# EAGLE board P24v04r16A(several_comments_on_layer51) (EAGLE 6.5.0), part 1 of 2
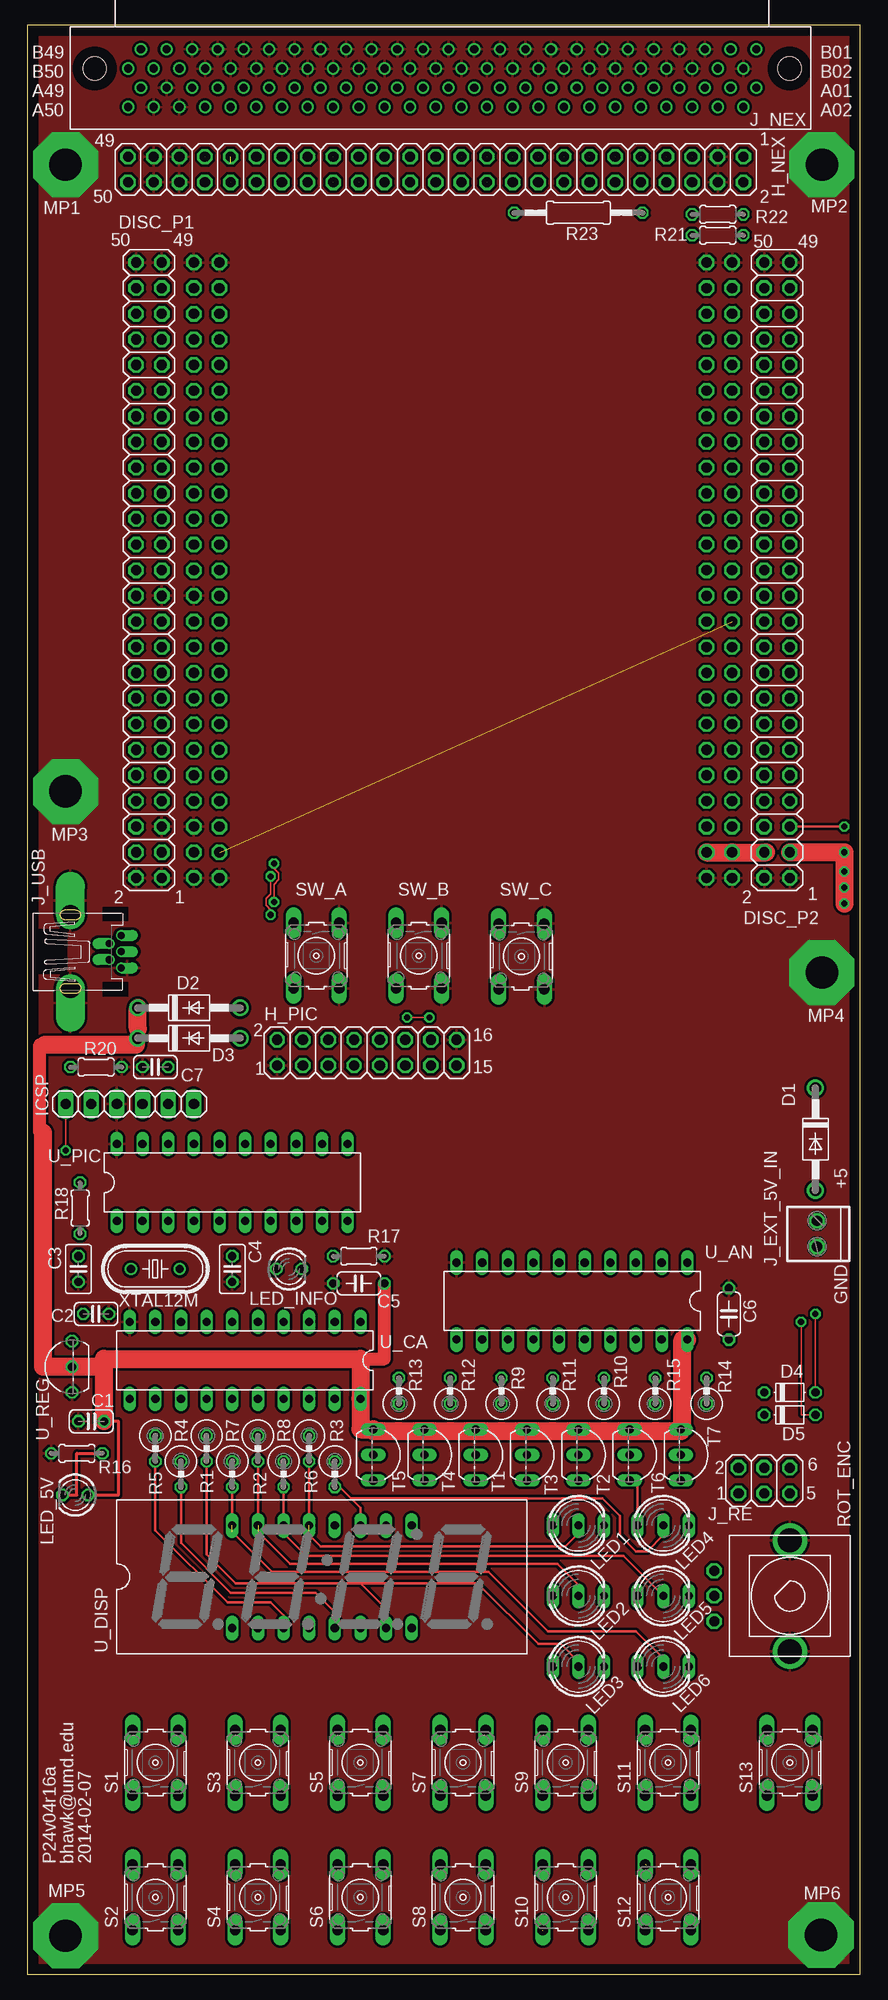
[diagram p0: board, top side]
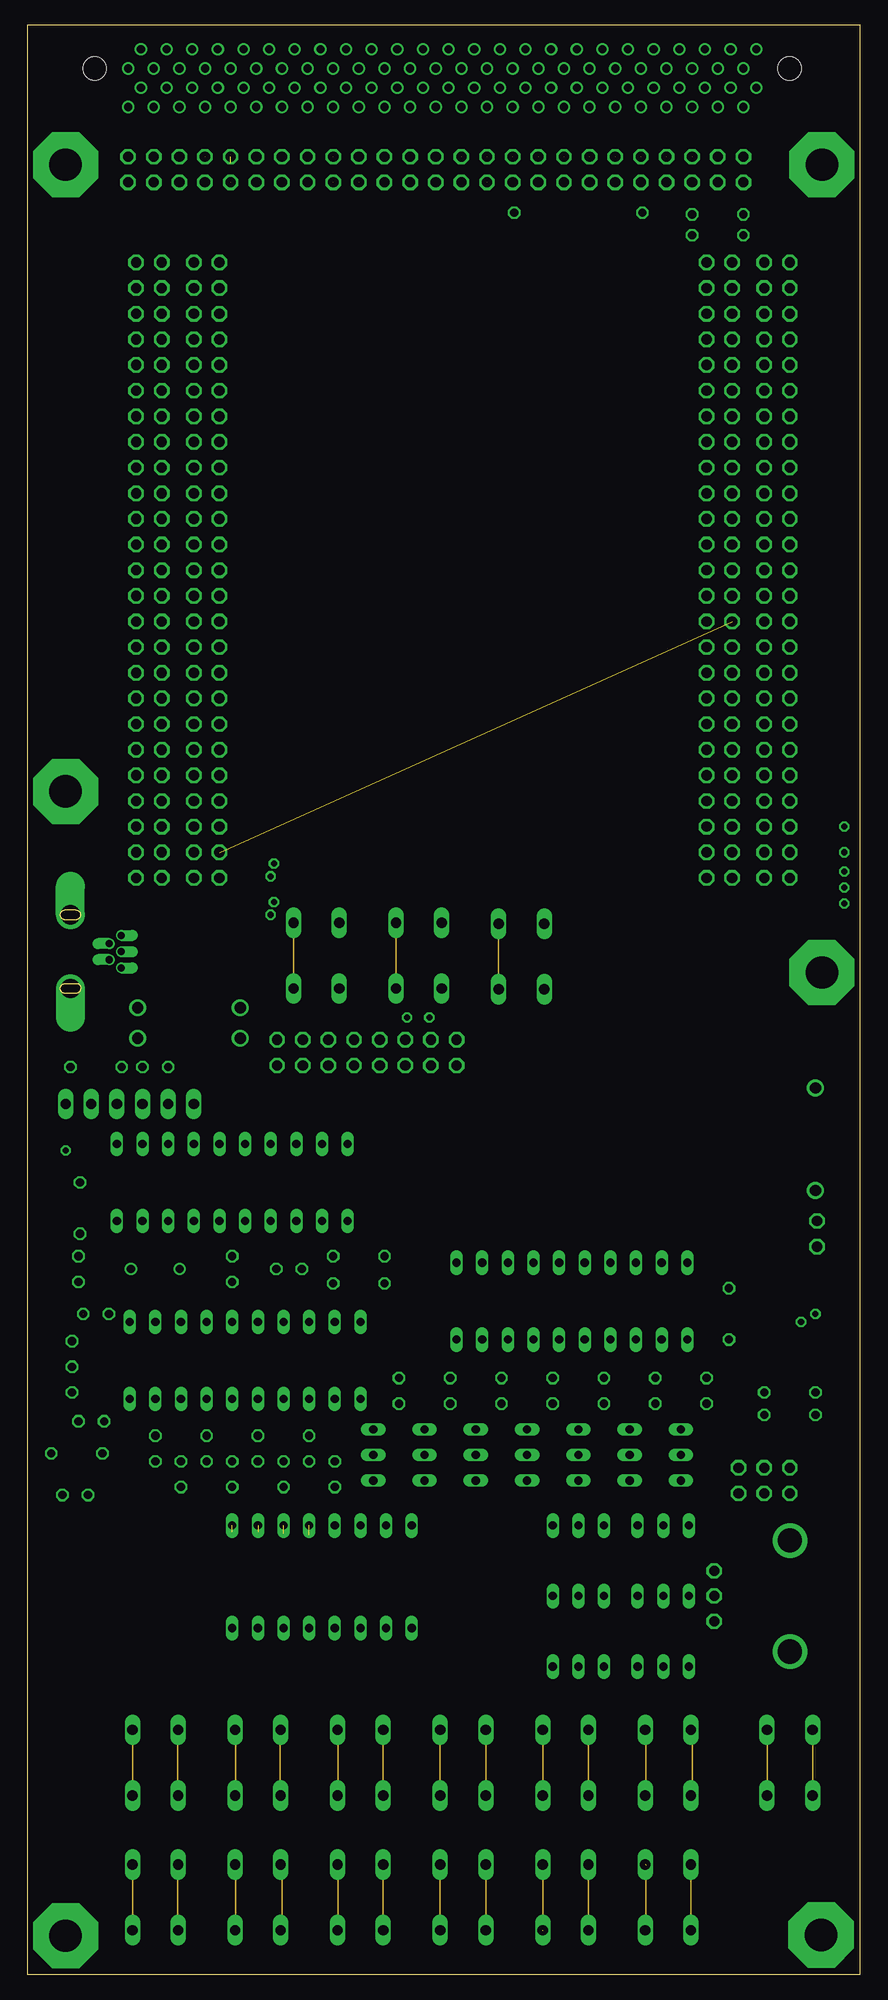
[diagram p1: board, inner layer Route15]
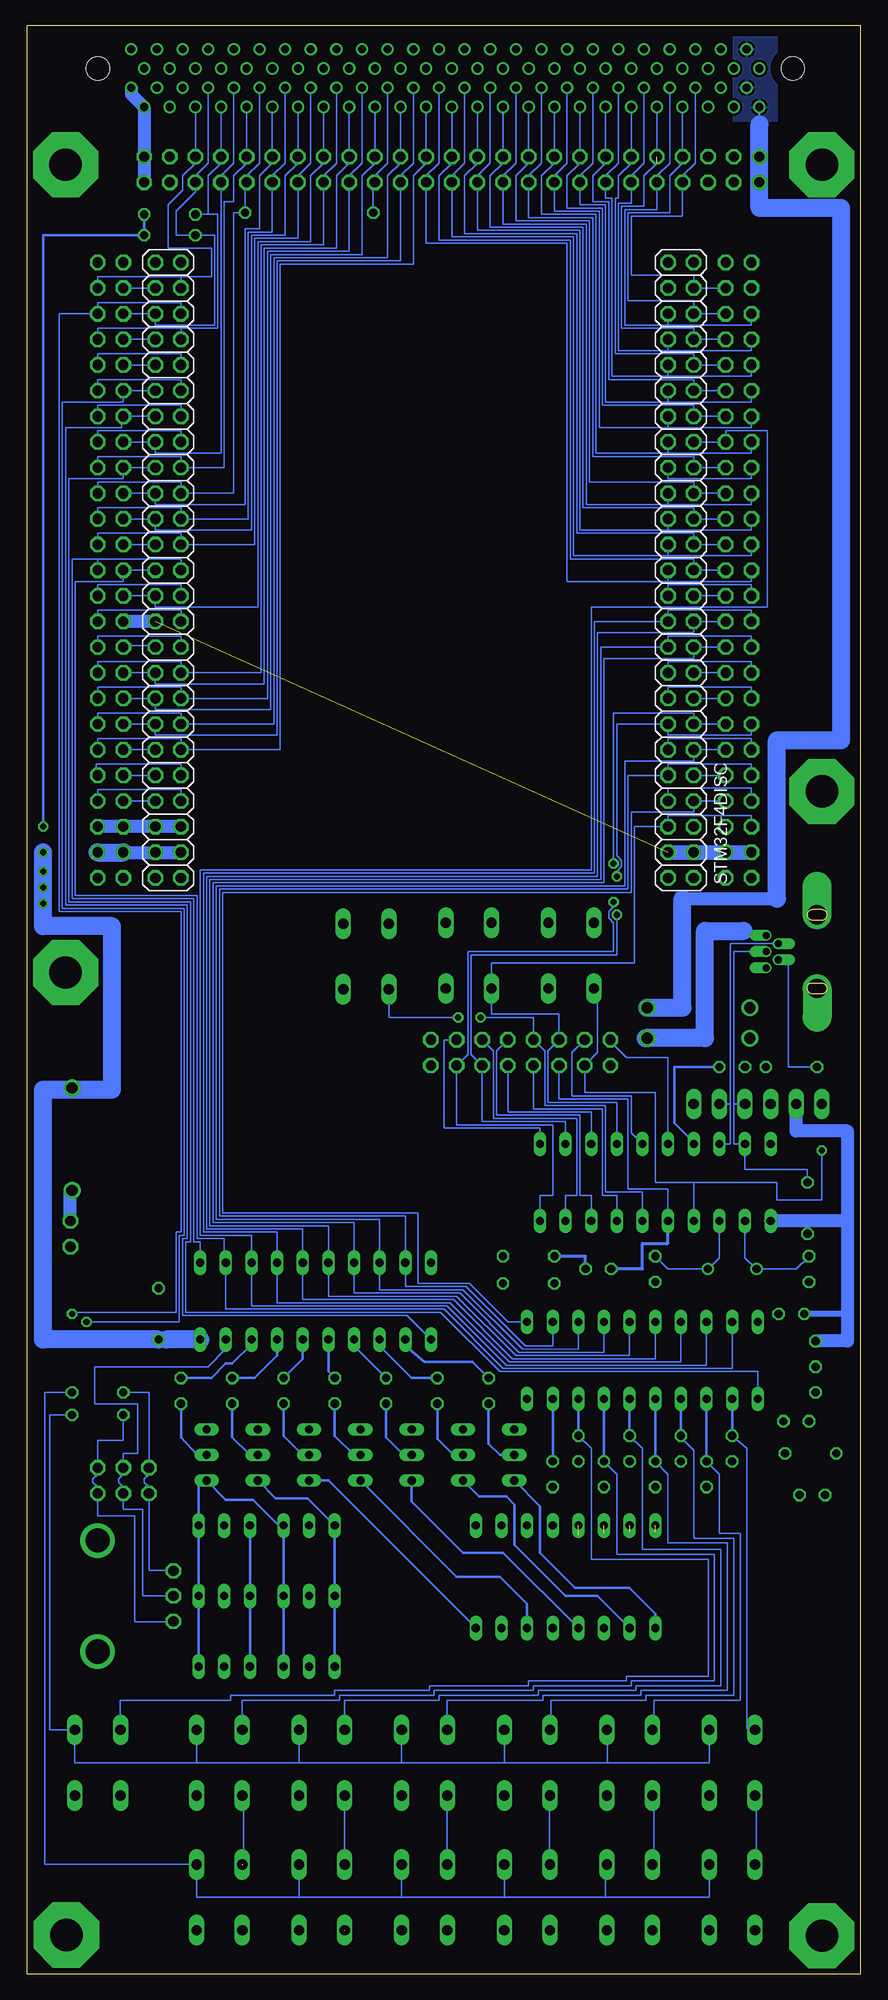
[diagram p2: board, bottom side, seen from below]

Size 82.55 x 193.04 mm. Coordinates in mm from the lower left corner, seen from the top.
Outline: 0,0 82.55,0 82.55,193.04 0,193.04 0,0
Copper layers (1*2+15*16): Top 0.035mm / dielectric 1.5mm / Route2 0.035mm / dielectric 0.15mm / Route15 0.035mm / dielectric 0.2mm / Bottom 0.035mm
Design rules "default": minimum track width 6mil, minimum drill 15mil, track to track 10mil, track to pad 10mil, pad to pad 10mil, via to via 10mil, smd to smd 10mil, copper to edge 40mil, drill to drill 8mil, minimum pad ring 8mil, minimum via ring 8mil, stop-mask expansion 4mil, vias tented up to drill 0mil, thermal gap 10mil

## Footprints (pad centres in the part's own frame; a part is rotated, then mirrored left to right if it is on the bottom)
C025-024X044 = drill 0.813 octagon: 1 -1.27,0; 2 1.27,0
C025-025X050 = drill 0.813 octagon: 1 -1.27,0; 2 1.27,0
C050-024X044 = drill 0.813 octagon: 1 -2.54,0; 2 2.54,0
DO41-10 = drill 1.118: A 5.08,0; C -5.08,0
D-5 = drill 0.813 octagon: A 2.54,0; C -2.54,0
2X25 = drill 1.016 octagon: 1 -30.48,-1.27; 2 -30.48,1.27; 3 -27.94,-1.27; 4 -27.94,1.27; 5 -25.4,-1.27; 6 -25.4,1.27; 7 -22.86,-1.27; 8 -22.86,1.27; 9 -20.32,-1.27; 10 -20.32,1.27; 11 -17.78,-1.27; 12 -17.78,1.27; 13 -15.24,-1.27; 14 -15.24,1.27; 15 -12.7,-1.27; 16 -12.7,1.27; 17 -10.16,-1.27; 18 -10.16,1.27; 19 -7.62,-1.27; 20 -7.62,1.27; 21 -5.08,-1.27; 22 -5.08,1.27; 23 -2.54,-1.27; 24 -2.54,1.27; 25 0,-1.27; 26 0,1.27; 27 2.54,-1.27; 28 2.54,1.27; 29 5.08,-1.27; 30 5.08,1.27; 31 7.62,-1.27; 32 7.62,1.27; 33 10.16,-1.27; 34 10.16,1.27; 35 12.7,-1.27; 36 12.7,1.27; 37 15.24,-1.27; 38 15.24,1.27; 39 17.78,-1.27; 40 17.78,1.27; 41 20.32,-1.27; 42 20.32,1.27; 43 22.86,-1.27; 44 22.86,1.27; 45 25.4,-1.27; 46 25.4,1.27; 47 27.94,-1.27; 48 27.94,1.27; 49 30.48,-1.27; 50 30.48,1.27
2X08 = drill 1.016 octagon: 1 -8.89,-1.27; 2 -8.89,1.27; 3 -6.35,-1.27; 4 -6.35,1.27; 5 -3.81,-1.27; 6 -3.81,1.27; 7 -1.27,-1.27; 8 -1.27,1.27; 9 1.27,-1.27; 10 1.27,1.27; 11 3.81,-1.27; 12 3.81,1.27; 13 6.35,-1.27; 14 6.35,1.27; 15 8.89,-1.27; 16 8.89,1.27
1X06 = drill 1.016 long: 1 -6.35,0; 2 -3.81,0; 3 -1.27,0; 4 1.27,0; 5 3.81,0; 6 6.35,0
PHOENIX_2POS_254 = drill 1.016 octagon: 1 -1.27,0; 2 1.27,0
FX2-100S_NEXYS2_SIGNALS = drill 0.8: A01_VCC3V3 0,0; A02_VCC3V3 -1.27,-1.905; A03_TMS -2.54,0; A04_JTSEL -3.81,-1.905; A05_TDO -5.08,0; A06_IO1 -6.35,-1.905; A07_IO2 -7.62,0; A08_IO3 -8.89,-1.905; A09_IO4 -10.16,0; A10_IO5 -11.43,-1.905; A11_IO6 -12.7,0; A12_IO7 -13.97,-1.905; A13_IO8 -15.24,0; A14_IO9 -16.51,-1.905; A15_IO10 -17.78,0; A16_IO11 -19.05,-1.905; A17_IO12 -20.32,0; A18_IN-13 -21.59,-1.905; A19_IO14 -22.86,0; A20_IO15 -24.13,-1.905; A21_IO16 -25.4,0; A22_IO17 -26.67,-1.905; A23_IO18 -27.94,0; A24_IO19 -29.21,-1.905; A25_IO20 -30.48,0; A26_IO21 -31.75,-1.905; A27_IO22 -33.02,0; A28_IO23 -34.29,-1.905; A29_IO24 -35.56,0; A30_IO25 -36.83,-1.905; A31_IO26 -38.1,0; A32_IO27 -39.37,-1.905; A33_IN-28 -40.64,0; A34_IN-29 -41.91,-1.905; A35_IO30 -43.18,0; A36_IO31 -44.45,-1.905; A37_IO32 -45.72,0; A38_IO33 -46.99,-1.905; A39_IO34 -48.26,0; A40_IO35 -49.53,-1.905; A41_IO36 -50.8,0; A42_IO37 -52.07,-1.905; A43_IO38 -53.34,0; A44_IO39 -54.61,-1.905; A45_IO40 -55.88,0; A46_GND -57.15,-1.905; A47_FX2-CLKOUT -58.42,0; A48_GND -59.69,-1.905; A49_VCC5V -60.96,0; A50_VCC5V -62.23,-1.905; B01_SHIELD 0,3.81; B02 -1.27,1.905; B03_TDO-ROM -2.54,3.81; B04_TCK -3.81,1.905; B05 -5.08,3.81; B06 -6.35,1.905; B07 -7.62,3.81; B08 -8.89,1.905; B09 -10.16,3.81; B10 -11.43,1.905; B11 -12.7,3.81; B12 -13.97,1.905; B13 -15.24,3.81; B14 -16.51,1.905; B15 -17.78,3.81; B16 -19.05,1.905; B17 -20.32,3.81; B18 -21.59,1.905; B19 -22.86,3.81; B20 -24.13,1.905; B21 -25.4,3.81; B22 -26.67,1.905; B23 -27.94,3.81; B24 -29.21,1.905; B25 -30.48,3.81; B26 -31.75,1.905; B27 -33.02,3.81; B28 -34.29,1.905; B29 -35.56,3.81; B30 -36.83,1.905; B31 -38.1,3.81; B32 -39.37,1.905; B33 -40.64,3.81; B34 -41.91,1.905; B35 -43.18,3.81; B36 -44.45,1.905; B37 -45.72,3.81; B38 -46.99,1.905; B39 -48.26,3.81; B40 -49.53,1.905; B41 -50.8,3.81; B42 -52.07,1.905; B43 -53.34,3.81; B44 -54.61,1.905; B45 -55.88,3.81; B46_FX2-CLKIN -57.15,1.905; B47 -58.42,3.81; B48_FX2-CLKIO -59.69,1.905; B49_VCC5V -60.96,3.81; B50_SHIELD -62.23,1.905 | hole 2.3: 3.31,1.905; -65.54,1.905
2X03 = drill 1.016 octagon: 1 -2.54,-1.27; 2 -2.54,1.27; 3 0,-1.27; 4 0,1.27; 5 2.54,-1.27; 6 2.54,1.27
USB_5P_MINI-DIP = drill 0.7 offset: 1 2.825,1.6; 2 1.625,0.8; 3 2.825,0; 4 1.625,-0.8; 5 2.825,-1.6 | drill 1.9 pad 2.3 offset: M1 -2.225,3.65; M2 -2.225,-3.65
DUOLED5MM = drill 0.813 long: AG -2.54,0; AR 2.54,0; K 0,0
LED3MM = drill 0.813 octagon: A -1.27,0; K 1.27,0
MOUNTING_HOLE125X250 = drill 3.2 pad 6.452 octagon: P$1 0,0
0309V = drill 0.813 octagon: 1 -1.27,0; 2 1.27,0
0204/5 = drill 0.813 octagon: 1 -2.54,0; 2 2.54,0
0207/12 = drill 0.813 octagon: 1 -6.35,0; 2 6.35,0
EVEG-H-K-L_V01 = drill 1 octagon: A -2.5,-7.5; B 2.5,-7.5; COM 0,-7.5 | drill 2.4: G1 -5.5,0; G2 5.5,0
B3F-10XX = drill 1.016 long: 1 -3.251,2.261; 2 3.251,2.261; 3 -3.251,-2.261; 4 3.251,-2.261
STM32F4DISCOVERY = drill 1.016 octagon: 01_GND 0,0; 02_GND 0,2.54; 03_VDD 2.54,0; 04_VDD 2.54,2.54; 05_GND 5.08,0; 06_NRST 5.08,2.54; 07_PC1 7.62,0; 08_PC0 7.62,2.54; 09_PC3 10.16,0; 10_PC2 10.16,2.54; 11_PA1 12.7,0; 12_PA0 12.7,2.54; 13_PA3 15.24,0; 14_PA2 15.24,2.54; 15_PA5 17.78,0; 16_PA4 17.78,2.54; 17_PA7 20.32,0; 18_PA6 20.32,2.54; 19_PC5 22.86,0; 20_PC4 22.86,2.54; 21_PB1 25.4,0; 22_PB0 25.4,2.54; 23_GND 27.94,0; 24_PB2 27.94,2.54; 25_PE7 30.48,0; 26_PE8 30.48,2.54; 27_PE9 33.02,0; 28_PE10 33.02,2.54; 29_PE11 35.56,0; 30_PE12 35.56,2.54; 31_PE13 38.1,0; 32_PE14 38.1,2.54; 33_PE15 40.64,0; 34_PB10 40.64,2.54; 35_PB11 43.18,0; 36_PB12 43.18,2.54; 37_PB13 45.72,0; 38_PB14 45.72,2.54; 39_PB15 48.26,0; 40_PD8 48.26,2.54; 41_PD9 50.8,0; 42_PD10 50.8,2.54; 43_PD11 53.34,0; 44_PD12 53.34,2.54; 45_PD13 55.88,0; 46_PD14 55.88,2.54; 47_PD15 58.42,0; 48_NC 58.42,2.54; 49_GND 60.96,0; 50_GND 60.96,2.54; 51_GND 0,50.8; 52_GND 0,53.34; 53_5V 2.54,50.8; 54_5V 2.54,53.34; 55_3V 5.08,50.8; 56_3V 5.08,53.34; 57_PH0 7.62,50.8; 58_PH1 7.62,53.34; 59_PC14 10.16,50.8; 60_PC15 10.16,53.34; 61_PE6 12.7,50.8; 62_PC13 12.7,53.34; 63_PE4 15.24,50.8; 64_PE5 15.24,53.34; 65_PE2 17.78,50.8; 66_PE3 17.78,53.34; 67_PE0 20.32,50.8; 68_PE1 20.32,53.34; 69_PB8 22.86,50.8; 70_PB9 22.86,53.34; 71_BOOT0 25.4,50.8; 72_VDD 25.4,53.34; 73_PB6 27.94,50.8; 74_PB7 27.94,53.34; 75_PB4 30.48,50.8; 76_PB5 30.48,53.34; 77_PD7 33.02,50.8; 78_PB3 33.02,53.34; 79_PD5 35.56,50.8; 80_PD6 35.56,53.34; 81_PD3 38.1,50.8; 82_PD4 38.1,53.34; 83_PD1 40.64,50.8; 84_PD2 40.64,53.34; 85_PC12 43.18,50.8; 86_PD0 43.18,53.34; 87_PC10 45.72,50.8; 88_PC11 45.72,53.34; 89_PA14 48.26,50.8; 90_PA15 48.26,53.34; 91_PA10 50.8,50.8; 92_PA13 50.8,53.34; 93_PA8 53.34,50.8; 94_PA9 53.34,53.34; 95_PC8 55.88,50.8; 96_PC9 55.88,53.34; 97_PC6 58.42,50.8; 98_PC7 58.42,53.34; 99_GND 60.96,50.8; 100_GND 60.96,53.34
TO92-CBE = drill 0.813 long: B 0,0; C -2.54,0; E 2.54,0
DIL20 = drill 0.813 long: 1 -11.43,-3.81; 2 -8.89,-3.81; 3 -6.35,-3.81; 4 -3.81,-3.81; 5 -1.27,-3.81; 6 1.27,-3.81; 7 3.81,-3.81; 8 6.35,-3.81; 9 8.89,-3.81; 10 11.43,-3.81; 11 11.43,3.81; 12 8.89,3.81; 13 6.35,3.81; 14 3.81,3.81; 15 1.27,3.81; 16 -1.27,3.81; 17 -3.81,3.81; 18 -6.35,3.81; 19 -8.89,3.81; 20 -11.43,3.81
LTC-4627_00 = drill 0.813 long: 1 -8.89,-5.08; 2 -6.35,-5.08; 3 -3.81,-5.08; 4 -1.27,-5.08; 5 1.27,-5.08; 6 3.81,-5.08; 7 6.35,-5.08; 8 8.89,-5.08; 9 8.89,5.08; 10 6.35,5.08; 11 3.81,5.08; 12 1.27,5.08; 13 -1.27,5.08; 14 -3.81,5.08; 15 -6.35,5.08; 16 -8.89,5.08
DIL20' = drill 0.813 long: 1 -10.16,-3.81; 2 -7.62,-3.81; 3 -5.08,-3.81; 4 -2.54,-3.81; 5 0,-3.81; 6 2.54,-3.81; 7 5.08,-3.81; 8 7.62,-3.81; 9 10.16,-3.81; 10 12.7,-3.81; 11 12.7,3.81; 12 10.16,3.81; 13 7.62,3.81; 14 5.08,3.81; 15 2.54,3.81; 16 0,3.81; 17 -2.54,3.81; 18 -5.08,3.81; 19 -7.62,3.81; 20 -10.16,3.81
TO92- = drill 0.813 octagon: 1 -2.54,0; 2 0,0; 3 2.54,0
HC49U-V = drill 0.813: 1 -2.413,0; 2 2.413,0

## Placement (x,y rotation side)
C1  ,P24CTL,DIG,445-5309-ND,CAP CER 1UF 10V 10% RADIAL,0.32,1,0.0222,10,0.1333,100,  [C025-024X044]  6.35,54.77 0 top
C2  ,P24CTL,DIG,445-5309-ND,CAP CER 1UF 10V 10% RADIAL,0.32,1,0.0222,10,0.1333,100,  [C025-024X044]  6.83,65.41 180 top
C3  ,P24CT,DIG,BC1034CT-ND,CAP CER 22PF 50V 5% RADIAL,0.25200,10,0.11760,100,  [C025-025X050]  5.08,69.85 270 top
C4  ,P24CT,DIG,BC1034CT-ND,CAP CER 22PF 50V 5% RADIAL,0.25200,10,0.11760,100,  [C025-025X050]  20.32,69.85 270 top
C5  ,P24IO,DIG,445-2849-ND,CAP CER 0.22UF 16V 10% RADIAL,0.29,1,0.20,10,0.12,100,  [C050-024X044]  32.86,68.42 180 top
C6  ,P24IO,DIG,445-2849-ND,CAP CER 0.22UF 16V 10% RADIAL,0.29,1,0.20,10,0.12,100,  [C050-024X044]  69.53,65.41 90 top
C7  ,P24CTL,DIG,445-5309-ND,CAP CER 1UF 10V 10% RADIAL,0.32,1,0.0222,10,0.1333,100,  [C025-024X044]  12.7,89.85 180 top
D1  ,P24IO,DIG,1N5817DICT-ND,DIODE SCHOTTKY 20V 1A DO-41,0.2039,100,  [DO41-10]  78.11,82.71 270 top
D2  ,P24IO,DIG,1N5817DICT-ND,DIODE SCHOTTKY 20V 1A DO-41,0.2039,100,  [DO41-10]  16.03,95.73 0 top
D3  ,P24IO,DIG,1N5817DICT-ND,DIODE SCHOTTKY 20V 1A DO-41,0.2039,100,  [DO41-10]  16.03,92.71 0 top
D4  [D-5]  75.56,57.63 0 top
D5  [D-5]  75.56,55.4 0 top
DISC_P1  [2X25]  12.06,139.06 90 top
DISC_P2  [2X25]  74.3,139.07 90 top
H_NEX  [2X25]  40.48,178.75 180 top
H_PIC  [2X08]  33.66,91.28 0 top
ICSP  [1X06]  10.16,86.2 0 top
J_EXT_5V_IN  [PHOENIX_2POS_254]  78.26,73.34 270 top
J_NEX  [FX2-100S_NEXYS2_SIGNALS]  72.23,186.85 0 top
J_RE  [2X03]  73.03,48.9 0 top
J_USB  ,P24CTL,DIG,WM17115-ND,CONN USB RECEPTACLE 5POS RT ANG,1.35200,10,1.26920,25,1.21420,50,  [USB_5P_MINI-DIP]  6.51,101.28 0 top
LED1  ,P24IO,DIG,754-1232-ND,LED IND 5MM RED/GRN WHT DIFF,0.2016,,  [DUOLED5MM]  54.61,44.45 0 top
LED2  ,P24IO,DIG,754-1232-ND,LED IND 5MM RED/GRN WHT DIFF,0.2016,,  [DUOLED5MM]  54.61,37.47 0 top
LED3  ,P24IO,DIG,754-1232-ND,LED IND 5MM RED/GRN WHT DIFF,0.2016,,  [DUOLED5MM]  54.61,30.48 0 top
LED4  ,P24IO,DIG,754-1232-ND,LED IND 5MM RED/GRN WHT DIFF,0.2016,,  [DUOLED5MM]  63.02,44.45 0 top
LED5  ,P24IO,DIG,754-1232-ND,LED IND 5MM RED/GRN WHT DIFF,0.2016,,  [DUOLED5MM]  63.02,37.47 0 top
LED6  ,P24IO,DIG,754-1232-ND,LED IND 5MM RED/GRN WHT DIFF,0.2016,,  [DUOLED5MM]  63.02,30.48 0 top
LED_5V  ,P24IO,DIG,754-1211-ND,LED SS 3MM 625NM RED DIFF,0.09,,  [LED3MM]  4.76,47.47 180 top
LED_INFO  ,P24CTL,DIG,754-1211-ND,LED SS 3MM 625NM RED DIFF,0.09,,  [LED3MM]  25.95,69.86 0 top
MP1  MOUNTING_HOLE  [MOUNTING_HOLE125X250]  3.81,179.23 0 top
MP2  MOUNTING_HOLE  [MOUNTING_HOLE125X250]  78.74,179.23 0 top
MP3  MOUNTING_HOLE  [MOUNTING_HOLE125X250]  3.81,117.16 0 top
MP4  MOUNTING_HOLE  [MOUNTING_HOLE125X250]  78.74,99.22 0 top
MP5  MOUNTING_HOLE  [MOUNTING_HOLE125X250]  3.81,3.81 0 top
MP6  MOUNTING_HOLE  [MOUNTING_HOLE125X250]  78.66,3.89 0 top
R1  ,P24IO,DIG,CF18JT330RCT-ND,RES 330 OHM 1/8W 5% CF AXIAL,0.09,,  [0309V]  17.78,52.07 270 top
R2  ,P24IO,DIG,CF18JT330RCT-ND,RES 330 OHM 1/8W 5% CF AXIAL,0.09,,  [0309V]  22.86,52.07 270 top
R3  ,P24IO,DIG,CF18JT330RCT-ND,RES 330 OHM 1/8W 5% CF AXIAL,0.09,,  [0309V]  30.48,49.53 270 top
R4  ,P24IO,DIG,CF18JT330RCT-ND,RES 330 OHM 1/8W 5% CF AXIAL,0.09,,  [0309V]  15.24,49.53 270 top
R5  ,P24IO,DIG,CF18JT330RCT-ND,RES 330 OHM 1/8W 5% CF AXIAL,0.09,,  [0309V]  12.7,52.07 270 top
R6  ,P24IO,DIG,CF18JT330RCT-ND,RES 330 OHM 1/8W 5% CF AXIAL,0.09,,  [0309V]  27.94,52.07 270 top
R7  ,P24IO,DIG,CF18JT330RCT-ND,RES 330 OHM 1/8W 5% CF AXIAL,0.09,,  [0309V]  20.32,49.53 270 top
R8  ,P24IO,DIG,CF18JT330RCT-ND,RES 330 OHM 1/8W 5% CF AXIAL,0.09,,  [0309V]  25.4,49.53 270 top
R9  ,P24IO,DIG,CF18JT4K70CT-ND,RES 4.7K OHM 1/8W 5% CF AXIAL,0.09,1,  [0309V]  46.99,57.78 90 top
R10  ,P24IO,DIG,CF18JT4K70CT-ND,RES 4.7K OHM 1/8W 5% CF AXIAL,0.09,1,  [0309V]  57.15,57.78 90 top
R11  ,P24IO,DIG,CF18JT4K70CT-ND,RES 4.7K OHM 1/8W 5% CF AXIAL,0.09,1,  [0309V]  52.07,57.78 90 top
R12  ,P24IO,DIG,CF18JT4K70CT-ND,RES 4.7K OHM 1/8W 5% CF AXIAL,0.09,1,  [0309V]  41.91,57.78 90 top
R13  ,P24IO,DIG,CF18JT4K70CT-ND,RES 4.7K OHM 1/8W 5% CF AXIAL,0.09,1,  [0309V]  36.83,57.78 90 top
R14  ,P24IO,DIG,CF18JT4K70CT-ND,RES 4.7K OHM 1/8W 5% CF AXIAL,0.09,1,  [0309V]  67.31,57.78 90 top
R15  ,P24IO,DIG,CF18JT4K70CT-ND,RES 4.7K OHM 1/8W 5% CF AXIAL,0.09,1,  [0309V]  62.23,57.78 90 top
R16  ,P24IO,DIG,CF18JT330RCT-ND,RES 330 OHM 1/8W 5% CF AXIAL,0.09,,  [0204/5]  4.92,51.59 0 top
R17  ,P24CTL,DIG,CF18JT330RCT-ND,RES 330 OHM 1/8W 5% CF AXIAL,0.09,,  [0204/5]  32.86,71.12 180 top
R18  ,P24CTL,DIG,CF18JT1K50CT-ND,RES 1.5K OHM 1/8W 5% CF AXIAL,0.09,1,  [0204/5]  5.24,75.88 90 top
R20  ,P24CTL,DIG,CF18JT100KCT-ND,RES 100K OHM 1/8W 5% CF AXIAL,0.09,1,  [0204/5]  6.83,89.85 180 top
R21  ,P24NXYS,DIG,CF18JT4K70CT-ND,RES 4.7K OHM 1/8W 5% CF AXIAL,0.09,1,  [0204/5]  68.42,172.24 180 top
R22  ,P24NXYS,DIG,CF18JT4K70CT-ND,RES 4.7K OHM 1/8W 5% CF AXIAL,0.09,1,  [0204/5]  68.42,174.31 180 top
R23  [0207/12]  54.61,174.47 180 top
ROT_ENC  ,P24IO,DIG,P10859-ND,ENCODER 12MM ROTARY VERT 17.5MM,0.54,  [EVEG-H-K-L_V01]  75.56,37.47 270 top
S1  ,P24IO,DIG,450-1649-ND,SWITCH TACTILE SPST-NO 0.05A 12V,0.09852,  [B3F-10XX]  12.7,20.95 90 top
S2  ,P24IO,DIG,450-1649-ND,SWITCH TACTILE SPST-NO 0.05A 12V,0.09852,  [B3F-10XX]  12.7,7.62 90 top
S3  ,P24IO,DIG,450-1649-ND,SWITCH TACTILE SPST-NO 0.05A 12V,0.09852,  [B3F-10XX]  22.86,20.95 90 top
S4  ,P24IO,DIG,450-1649-ND,SWITCH TACTILE SPST-NO 0.05A 12V,0.09852,  [B3F-10XX]  22.86,7.62 90 top
S5  ,P24IO,DIG,450-1649-ND,SWITCH TACTILE SPST-NO 0.05A 12V,0.09852,  [B3F-10XX]  33.02,20.95 90 top
S6  ,P24IO,DIG,450-1649-ND,SWITCH TACTILE SPST-NO 0.05A 12V,0.09852,  [B3F-10XX]  33.02,7.62 90 top
S7  ,P24IO,DIG,450-1649-ND,SWITCH TACTILE SPST-NO 0.05A 12V,0.09852,  [B3F-10XX]  43.18,20.95 90 top
S8  ,P24IO,DIG,450-1649-ND,SWITCH TACTILE SPST-NO 0.05A 12V,0.09852,  [B3F-10XX]  43.18,7.62 90 top
S9  ,P24IO,DIG,450-1649-ND,SWITCH TACTILE SPST-NO 0.05A 12V,0.09852,  [B3F-10XX]  53.34,20.95 90 top
S10  ,P24IO,DIG,450-1649-ND,SWITCH TACTILE SPST-NO 0.05A 12V,0.09852,  [B3F-10XX]  53.34,7.62 90 top
S11  ,P24IO,DIG,450-1649-ND,SWITCH TACTILE SPST-NO 0.05A 12V,0.09852,  [B3F-10XX]  63.5,20.95 90 top
S12  ,P24IO,DIG,450-1649-ND,SWITCH TACTILE SPST-NO 0.05A 12V,0.09852,  [B3F-10XX]  63.5,7.62 90 top
S13  ,P24IO,DIG,450-1649-ND,SWITCH TACTILE SPST-NO 0.05A 12V,0.09852,  [B3F-10XX]  75.56,20.95 90 top
STM32F4DISC  [STM32F4DISCOVERY]  16.51,108.58 90 bottom
SW_A  ,P24CTL,DIG,450-1649-ND,SWITCH TACTILE SPST-NO 0.05A 12V,0.09852,  [B3F-10XX]  28.65,100.89 270 top
SW_B  ,P24CTL,DIG,450-1649-ND,SWITCH TACTILE SPST-NO 0.05A 12V,0.09852,  [B3F-10XX]  38.81,100.89 270 top
SW_C  ,P24CTL,DIG,450-1649-ND,SWITCH TACTILE SPST-NO 0.05A 12V,0.09852,  [B3F-10XX]  48.97,100.81 270 top
T1  ,P24IO,DIG,2N3906-APCT-ND,TRANSISTOR PNP GP 40V TO92,0.12,100,  [TO92-CBE]  44.45,51.44 270 top
T2  ,P24IO,DIG,2N3906-APCT-ND,TRANSISTOR PNP GP 40V TO92,0.12,100,  [TO92-CBE]  54.61,51.44 270 top
T3  ,P24IO,DIG,2N3906-APCT-ND,TRANSISTOR PNP GP 40V TO92,0.12,100,  [TO92-CBE]  49.53,51.44 270 top
T4  ,P24IO,DIG,2N3906-APCT-ND,TRANSISTOR PNP GP 40V TO92,0.12,100,  [TO92-CBE]  39.37,51.44 270 top
T5  ,P24IO,DIG,2N3906-APCT-ND,TRANSISTOR PNP GP 40V TO92,0.12,100,  [TO92-CBE]  34.29,51.44 270 top
T6  ,P24IO,DIG,2N3906-APCT-ND,TRANSISTOR PNP GP 40V TO92,0.12,100,  [TO92-CBE]  59.69,51.44 270 top
T7  ,P24IO,DIG,2N3906-APCT-ND,TRANSISTOR PNP GP 40V TO92,0.12,100,  [TO92-CBE]  64.77,51.44 270 top
U_AN  ,P24IO,DIG,AE9998-ND,IC SOCKET STRAIGHT 20POS TIN,0.27300,10,0.23400,25,0.19900,50,0.19110,100,  [DIL20]  53.98,66.67 180 top
U_CA  ,P24IO,DIG,AE9998-ND,IC SOCKET STRAIGHT 20POS TIN,0.27300,10,0.23400,25,0.19900,50,0.19110,100,  [DIL20]  21.59,60.8 180 top
U_DISP  ,P24IO,DIG,160-1550-5-ND,LED 7-SEG .4" 4DGT SUPER RED CA,2.70500,10,  [LTC-4627_00]  29.21,39.37 0 top
U_PIC  ,P24CTL,DIG,AE9998-ND,IC SOCKET STRAIGHT 20POS TIN,0.27300,10,0.23400,25,0.19900,50,0.19110,100,  [DIL20']  19.05,78.42 0 top
U_REG  ,P24CTL,DIG,MCP1700-3302E/TO-ND,IC LDO REG 250MA 3.3V TO-92-3,0.53,1,8.25,25,  [TO92-]  4.45,60.17 90 top
XTAL12M  ,P24CTL,DIG,CTX904-ND,CRYSTAL 12.0 MHZ 18PF,0.261,10,  [HC49U-V]  12.7,69.85 180 top

## Library data of the parts
C1-C7 R1-R18 R20-R23 = rcl
D1-D5 = diode
DISC_P1 DISC_P2 H_NEX H_PIC ICSP J_RE = pinhead
J_EXT_5V_IN = phoenix_254
J_NEX = hirose-conn
J_USB = USB_5P_mini-DIP
LED1-LED6 LED_5V LED_INFO = led
MP1-MP6 = mounting_hole_mod
ROT_ENC = panasonic_12mm_rotary_encoder_01
S1-S13 SW_A SW_B SW_C = switch-omron
STM32F4DISC = temp1
T1-T7 = transistor
U_AN U_CA = 74ttl-din
U_DISP = LTC-4627
U_PIC = microchip_pic18f14k50
U_REG = maxim
XTAL12M = crystal

## Nets
5V_IN: D1.A J_EXT_5V_IN.1
5V_PWR: LED_5V.K R16.2
(D)SW_1-3-5-7-9-11-13-ROT_ENC-B: D5.C J_RE.5 J_RE.6 ROT_ENC.B
(D)SW_2-4-6-8-10-12-ROT_ENC-A: D4.C J_RE.1 J_RE.2 ROT_ENC.A
(R)AN_G: R15.2 U_AN.17
(R)AN_R: R14.2 U_AN.18
(R)CA_A/LED5/SW_11-12: R8.1 S11.1 S11.2 S12.1 S12.2 U_CA.17
(R)CA_B/LED6/SW_7-8: R7.1 S7.1 S7.2 S8.1 S8.2 U_CA.15
(R)CA_C/LED1/SW_13: R6.1 S13.1 S13.2 U_CA.18
(R)CA_D/SW_1-2: R5.1 S1.1 S1.2 S2.1 S2.2 U_CA.12
(R)CA_DP/LED3/SW_5-6: R1.1 S5.1 S5.2 S6.1 S6.2 U_CA.14
(R)CA_E/SW_3-4: R4.1 S3.1 S3.2 S4.1 S4.2 U_CA.13
(R)CA_F/LED4: R3.1 U_CA.19
(R)CA_G/LED2/SW_9-10: R2.1 S9.1 S9.2 S10.1 S10.2 U_CA.16
(R)COLON: R9.2 U_AN.14
(R)DIGIT1: R13.2 U_AN.12
(R)DIGIT2: R12.2 U_AN.13
(R)DIGIT3: R11.2 U_AN.15
(R)DIGIT4: R10.2 U_AN.16
(R)FSMC_CLK/NEXYS_GCLK10: H_NEX.20 J_NEX.A21_IO16 R23.2
(T)AN_G: R15.1 T6.B
(T)AN_R: R14.1 T7.B
(T)COLON: R9.1 T1.B
(T)DIGIT1: R13.1 T5.B
(T)DIGIT2: R12.1 T4.B
(T)DIGIT3: R11.1 T3.B
(T)DIGIT4: R10.1 T2.B
+3V3: C2.2 ICSP.2 R18.1 U_PIC.1 U_REG.3
AN_G: LED1.AG LED2.AG LED3.AG LED4.AG LED5.AG LED6.AG T6.E
AN_R: LED1.AR LED2.AR LED3.AR LED4.AR LED5.AR LED6.AR T7.E
CA_A/LED5: LED5.K R8.2 U_DISP.14
CA_B/LED6: LED6.K R7.2 U_DISP.16
CA_C/LED1: LED1.K R6.2 U_DISP.13
CA_D: R5.2 U_DISP.3
CA_DP/LED3: LED3.K R1.2 U_DISP.7
CA_E: R4.2 U_DISP.5
CA_F/LED4: LED4.K R3.2 U_DISP.11
CA_G/LED2: LED2.K R2.2 U_DISP.15
COLON: T1.E U_DISP.4
DAC_I2S3_MCLK: DISC_P2.48 STM32F4DISC.98_PC7
DAC_I2S3_SCK: DISC_P2.37 STM32F4DISC.87_PC10
DAC_I2S3_SD: DISC_P2.35 STM32F4DISC.85_PC12
DAC_I2S3_WS: DISC_P1.16 STM32F4DISC.16_PA4
DAC_SCL: DISC_P2.23 STM32F4DISC.73_PB6
DAC_SDA: DISC_P2.20 STM32F4DISC.70_PB9
DIGIT1: T5.E U_DISP.1
DIGIT2: T4.E U_DISP.2
DIGIT3: T3.E U_DISP.6
DIGIT4: T2.E U_DISP.8
DISC_3V: DISC_P2.5 DISC_P2.6 R21.1 R22.1 STM32F4DISC.55_3V STM32F4DISC.56_3V
DISC_BOOT0: DISC_P2.21 STM32F4DISC.71_BOOT0
DISC_BOOT1: DISC_P1.24 STM32F4DISC.24_PB2
DISC_I2C3_SCL: DISC_P2.43 H_NEX.7 J_NEX.A08_IO3 R22.2 STM32F4DISC.93_PA8
DISC_I2C3_SDA: DISC_P2.46 H_NEX.6 J_NEX.A07_IO2 R21.2 STM32F4DISC.96_PC9
DISC_NRST/SWD_NRST/PIC_RC2: DISC_P1.6 H_PIC.6 STM32F4DISC.06_NRST SW_B.3 SW_B.4 U_PIC.14
DISC_OSC_IN: DISC_P2.9 STM32F4DISC.59_PC14
DISC_OSC_OUT: DISC_P2.10 STM32F4DISC.60_PC15
DISC_PH0: DISC_P2.7 STM32F4DISC.57_PH0
DISC_PH1: DISC_P2.8 STM32F4DISC.58_PH1
DISC_RTC_AF1: DISC_P2.12 STM32F4DISC.62_PC13
DISC_VDD(JP1_3V): DISC_P1.3 DISC_P1.4 DISC_P2.22 STM32F4DISC.03_VDD STM32F4DISC.04_VDD STM32F4DISC.72_VDD
FSMC_A16: DISC_P1.43 H_NEX.41 J_NEX.A42_IO37 STM32F4DISC.43_PD11
FSMC_A17: DISC_P1.44 H_NEX.40 J_NEX.A41_IO36 STM32F4DISC.44_PD12
FSMC_A18: DISC_P1.45 H_NEX.43 J_NEX.A44_IO39 STM32F4DISC.45_PD13
FSMC_A19/MEMS_CS_I2C-SPI: DISC_P2.16 H_NEX.19 J_NEX.A20_IO15 STM32F4DISC.66_PE3
FSMC_A20: DISC_P2.13 H_NEX.21 J_NEX.A22_IO17 STM32F4DISC.63_PE4
FSMC_A21: DISC_P2.14 H_NEX.22 J_NEX.A23_IO18 STM32F4DISC.64_PE5
FSMC_A22: DISC_P2.11 H_NEX.23 J_NEX.A24_IO19 STM32F4DISC.61_PE6
FSMC_A23: DISC_P2.15 H_NEX.18 J_NEX.A19_IO14 STM32F4DISC.65_PE2
FSMC_CLK: DISC_P2.31 H_NEX.10 J_NEX.A11_IO6 R23.1 STM32F4DISC.81_PD3
FSMC_DA00: DISC_P1.46 H_NEX.42 J_NEX.A43_IO38 STM32F4DISC.46_PD14
FSMC_DA01: DISC_P1.47 H_NEX.44 J_NEX.A45_IO40 STM32F4DISC.47_PD15
FSMC_DA02: DISC_P2.36 H_NEX.8 J_NEX.A09_IO4 STM32F4DISC.86_PD0
FSMC_DA03: DISC_P2.33 H_NEX.9 J_NEX.A10_IO5 STM32F4DISC.83_PD1
FSMC_DA04: DISC_P1.25 H_NEX.25 J_NEX.A26_IO21 STM32F4DISC.25_PE7
FSMC_DA05: DISC_P1.26 H_NEX.24 J_NEX.A25_IO20 STM32F4DISC.26_PE8
FSMC_DA06: DISC_P1.27 H_NEX.27 J_NEX.A28_IO23 STM32F4DISC.27_PE9
FSMC_DA07: DISC_P1.28 H_NEX.26 J_NEX.A27_IO22 STM32F4DISC.28_PE10
FSMC_DA08: DISC_P1.29 H_NEX.29 J_NEX.A30_IO25 STM32F4DISC.29_PE11
FSMC_DA09: DISC_P1.30 H_NEX.28 J_NEX.A29_IO24 STM32F4DISC.30_PE12
FSMC_DA10: DISC_P1.31 H_NEX.31 J_NEX.A32_IO27 STM32F4DISC.31_PE13
FSMC_DA11: DISC_P1.32 H_NEX.30 J_NEX.A31_IO26 STM32F4DISC.32_PE14
FSMC_DA12: DISC_P1.33 H_NEX.32 J_NEX.A33_IN-28 STM32F4DISC.33_PE15
FSMC_DA13: DISC_P1.40 H_NEX.36 J_NEX.A37_IO32 STM32F4DISC.40_PD8
FSMC_DA14: DISC_P1.41 H_NEX.39 J_NEX.A40_IO35 STM32F4DISC.41_PD9
FSMC_DA15: DISC_P1.42 H_NEX.38 J_NEX.A39_IO34 STM32F4DISC.42_PD10
FSMC_NADV: DISC_P2.24 H_NEX.15 J_NEX.A16_IO11 STM32F4DISC.74_PB7
FSMC_NBL0/MEMS_INT1: DISC_P2.17 H_NEX.16 J_NEX.A17_IO12 STM32F4DISC.67_PE0
FSMC_NBL1/MEMS_INT2: DISC_P2.18 H_NEX.17 J_NEX.A18_IN-13 STM32F4DISC.68_PE1
FSMC_NE1: DISC_P2.27 H_NEX.14 J_NEX.A15_IO10 STM32F4DISC.77_PD7
FSMC_NOE/DAC_NRST: DISC_P2.32 H_NEX.11 J_NEX.A12_IO7 STM32F4DISC.82_PD4
FSMC_NWAIT: DISC_P2.30 H_NEX.13 J_NEX.A14_IO9 STM32F4DISC.80_PD6
FSMC_NWE/OTG_FS_OVERCURRENT: DISC_P2.29 H_NEX.12 J_NEX.A13_IO8 STM32F4DISC.79_PD5
GND: C1.1 C2.1 C3.2 C4.2 C5.2 C6.2 C7.2 DISC_P1.1 DISC_P1.2 DISC_P1.5 DISC_P1.23 DISC_P1.49 DISC_P1.50 DISC_P2.1 DISC_P2.2 DISC_P2.49 DISC_P2.50 H_NEX.3 H_NEX.4 H_NEX.45 H_NEX.46 H_NEX.47 H_NEX.48 H_PIC.1 H_PIC.16 ICSP.3 J_EXT_5V_IN.2 J_NEX.A46_GND J_NEX.A47_FX2-CLKOUT J_NEX.A48_GND J_NEX.B02 J_NEX.B05 J_NEX.B06 J_NEX.B07 J_NEX.B08 J_NEX.B09 J_NEX.B10 J_NEX.B11 J_NEX.B12 J_NEX.B13 J_NEX.B14 J_NEX.B15 J_NEX.B16 J_NEX.B17 J_NEX.B18 J_NEX.B19 J_NEX.B20 J_NEX.B21 J_NEX.B22 J_NEX.B23 J_NEX.B24 J_NEX.B25 J_NEX.B26 J_NEX.B27 J_NEX.B28 J_NEX.B29 J_NEX.B30 J_NEX.B31 J_NEX.B32 J_NEX.B33 J_NEX.B34 J_NEX.B35 J_NEX.B36 J_NEX.B37 J_NEX.B38 J_NEX.B39 J_NEX.B40 J_NEX.B41 J_NEX.B42 J_NEX.B43 J_NEX.B44 J_NEX.B45 J_USB.5 J_USB.M1 J_USB.M2 MP1.P$1 MP2.P$1 MP3.P$1 MP4.P$1 MP5.P$1 MP6.P$1 R16.1 R17.1 R20.1 ROT_ENC.G1 ROT_ENC.G2 STM32F4DISC.01_GND STM32F4DISC.02_GND STM32F4DISC.05_GND STM32F4DISC.23_GND STM32F4DISC.49_GND STM32F4DISC.50_GND STM32F4DISC.51_GND STM32F4DISC.52_GND STM32F4DISC.99_GND STM32F4DISC.100_GND SW_A.1 SW_A.2 SW_B.1 SW_B.2 SW_C.1 SW_C.2 U_AN.10 U_CA.10 U_PIC.20 U_REG.1
MEMS_MISO: DISC_P1.18 STM32F4DISC.18_PA6
MEMS_MOSI: DISC_P1.17 STM32F4DISC.17_PA7
MEMS_SCLK: DISC_P1.15 STM32F4DISC.15_PA5
MIC_CLK: DISC_P1.34 STM32F4DISC.34_PB10
MIC_PDM: DISC_P1.9 STM32F4DISC.09_PC3
N$2: D3.A J_USB.1
N$32: LED_INFO.K R17.2
NEXYS_5V: D2.A J_NEX.A49_VCC5V J_NEX.A50_VCC5V J_NEX.B49_VCC5V
OTG_FS_ID: DISC_P2.41 STM32F4DISC.91_PA10
OTG_FS_POWER: DISC_P1.8 STM32F4DISC.08_PC0
OTG_VBUS_FS: DISC_P2.44 STM32F4DISC.94_PA9
P24_SYSTEM5V: C1.2 C5.1 C6.1 D1.C D2.C D3.C DISC_P2.3 DISC_P2.4 LED_5V.A STM32F4DISC.53_5V STM32F4DISC.54_5V T1.C T2.C T3.C T4.C T5.C T6.C T7.C U_AN.20 U_CA.20 U_REG.2
PA1/CA_C/LED1-DIGIT2: DISC_P1.11 STM32F4DISC.11_PA1 U_AN.8 U_CA.3
PA15/SW_1-3-5-7-9-11-13-ROT_ENC-B: D5.A DISC_P2.40 S1.3 S1.4 S3.3 S3.4 S5.3 S5.4 S7.3 S7.4 S9.3 S9.4 S11.3 S11.4 S13.3 S13.4 STM32F4DISC.90_PA15
PB0/CA_DP/LED3-AN_G: DISC_P1.22 STM32F4DISC.22_PB0 U_AN.4 U_CA.7
PB1/CA_B/LED6-DIGIT4: DISC_P1.21 STM32F4DISC.21_PB1 U_AN.5 U_CA.6
PB4/AN_EN: DISC_P2.25 STM32F4DISC.75_PB4 U_AN.1
PB5/CA_D/ROT_ENC-COM: DISC_P2.26 STM32F4DISC.76_PB5 U_AN.2 U_CA.9
PB11/CA_E-AN_R: DISC_P1.35 STM32F4DISC.35_PB11 U_AN.3 U_CA.8
PC1/CA_EN: DISC_P1.7 STM32F4DISC.07_PC1 U_CA.1
PC2/CA_F/LED4-DIGIT1: DISC_P1.10 STM32F4DISC.10_PC2 U_AN.9 U_CA.2
PC4/CA_G/LED2-DIGIT3: DISC_P1.20 STM32F4DISC.20_PC4 U_AN.6 U_CA.5
PC5/CA_A/LED5-COLON: DISC_P1.19 STM32F4DISC.19_PC5 U_AN.7 U_CA.4
PC6/DISC_USART6_TX(HALF-DUPLEX): DISC_P2.47 H_NEX.5 J_NEX.A06_IO1 STM32F4DISC.97_PC6
PC8/SW_2-4-6-8-10-12-ROT_ENC-A: D4.A DISC_P2.45 S2.3 S2.4 S4.3 S4.4 S6.3 S6.4 S8.3 S8.4 S10.3 S10.4 S12.3 S12.4 STM32F4DISC.95_PC8
PC11/AN_CLK: DISC_P2.38 STM32F4DISC.88_PC11 U_AN.11
PD2/CA_CLK: DISC_P2.34 STM32F4DISC.84_PD2 U_CA.11
PIC_MCLR: H_PIC.3 ICSP.1 SW_A.3 SW_A.4 U_PIC.4
PIC_OSC1: C3.1 U_PIC.2 XTAL12M.2
PIC_OSC2: C4.1 U_PIC.3 XTAL12M.1
PIC_RB4/SPI_SDI/I2C_SDA: H_PIC.9 U_PIC.13
PIC_RB5/RX/-/DISC_USART2_TX: DISC_P1.14 H_PIC.11 STM32F4DISC.14_PA2 U_PIC.12
PIC_RB6/SPI_SCK/I2C_SCL: H_PIC.14 U_PIC.11
PIC_RB7/TX/-/DISC_USART2_RX: DISC_P1.13 H_PIC.13 STM32F4DISC.13_PA3 U_PIC.10
PIC_RC0: H_PIC.2 U_PIC.16
PIC_RC1: H_PIC.4 U_PIC.15
PIC_RC3/LV_PGM: H_PIC.7 U_PIC.7
PIC_RC4: H_PIC.8 SW_C.3 SW_C.4 U_PIC.6
PIC_RC5: H_PIC.5 LED_INFO.A U_PIC.5
PIC_RC6/SPI_SS-: H_PIC.10 U_PIC.8
PIC_RC7/SPI_SDO: H_PIC.12 U_PIC.9
PIC_VUSB: C7.1 U_PIC.17
ROT_ENC-COM: J_RE.3 J_RE.4 ROT_ENC.COM U_AN.19
S$1: H_NEX.1 H_NEX.2 J_NEX.A01_VCC3V3 J_NEX.A02_VCC3V3
S$18: J_USB.4 R20.2
S$48: DISC_P2.19 STM32F4DISC.69_PB8
SPI2_MISO: DISC_P1.38 H_NEX.34 J_NEX.A35_IO30 STM32F4DISC.38_PB14
SPI2_MOSI: DISC_P1.39 H_NEX.37 J_NEX.A38_IO33 STM32F4DISC.39_PB15
SPI2_NSS: DISC_P1.36 H_NEX.33 J_NEX.A34_IN-29 STM32F4DISC.36_PB12
SPI2_SCK: DISC_P1.37 H_NEX.35 J_NEX.A36_IO31 STM32F4DISC.37_PB13
SWD_DISC_JTDO/TRACESWO: DISC_P2.28 STM32F4DISC.78_PB3
SWD_SWCLK: DISC_P2.39 STM32F4DISC.89_PA14
SWD_SWDIO: DISC_P2.42 STM32F4DISC.92_PA13
USB_D+/PGD: ICSP.4 J_USB.3 R18.2 U_PIC.19
USB_D-/PGC: ICSP.5 J_USB.2 U_PIC.18
USER_BUTTON: DISC_P1.12 STM32F4DISC.12_PA0